# Allegro board 野火_EBF6ULL F1 核心板_PCB封装参考设计_Allegro格式.brd
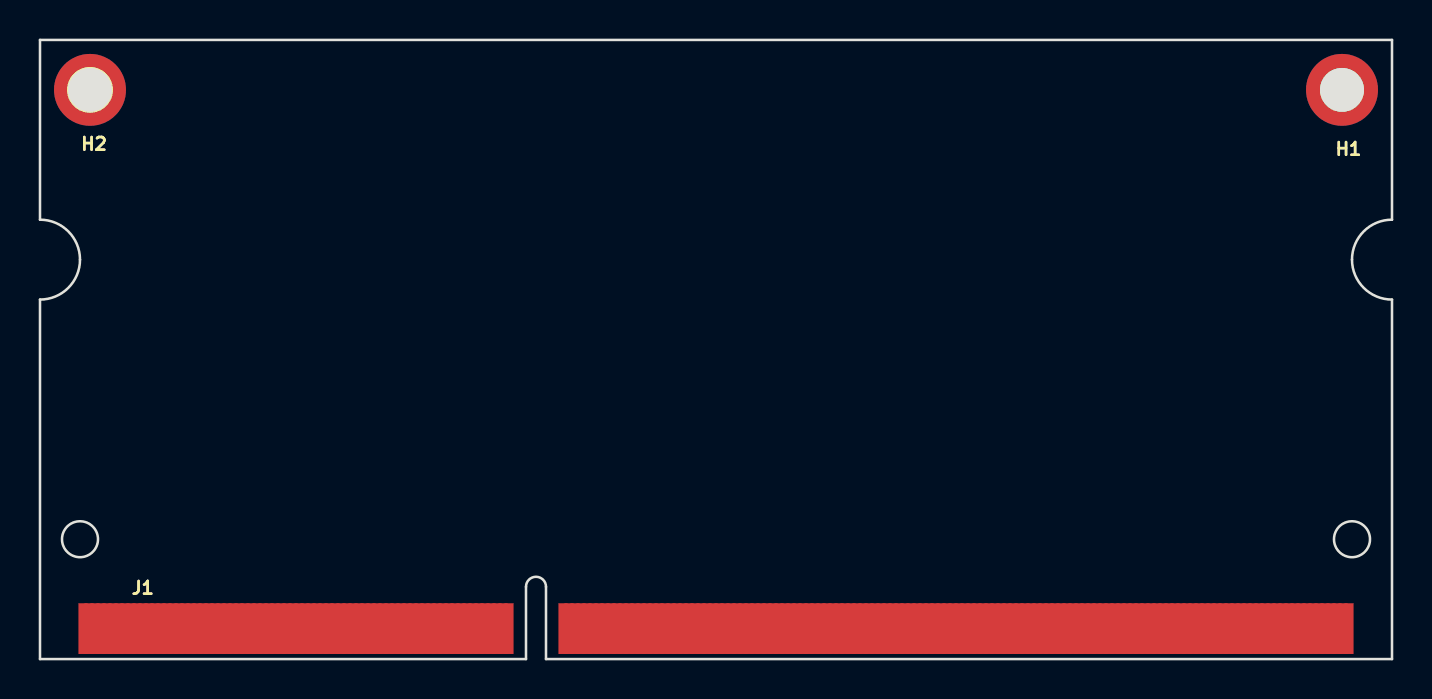
[diagram p0: board, top side]
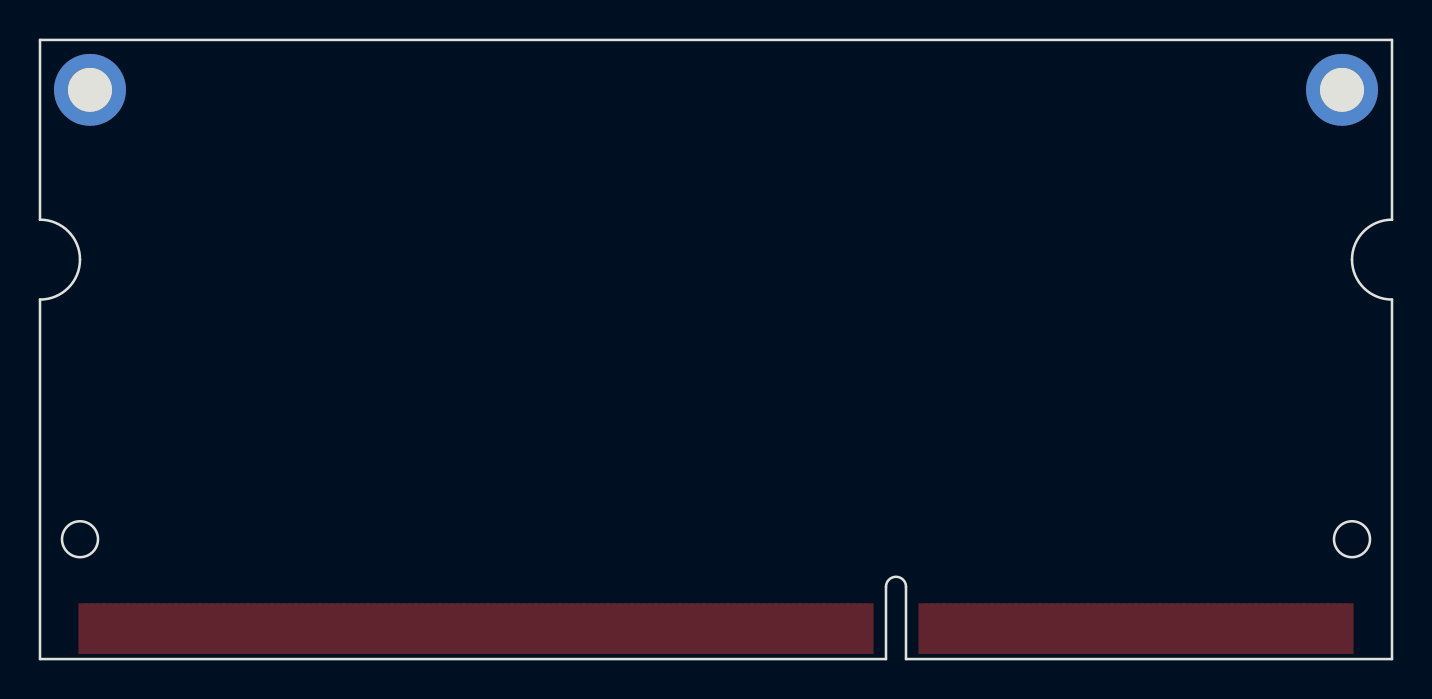
[diagram p1: board, bottom side, seen from below]

Outline 67.6 x 31 mm; copper layers: TOP, GND02, ART03, ART04, POWER05, BOTTOM. Coordinates in mm from the lower left corner of the outline.
Outline path: 67.6,31 0,31

## Design rules (mm)
constraint set DEFAULT: min track width 0.127
net group USB_OTG1_D: nets USB_OTG1_DN USB_OTG1_DP
net group USB_OTG2_D: nets USB_OTG2_DN USB_OTG2_DP

## Placement (name value [footprint] x y rotation side)
H1  2.0mm  [T2_5-4]  65.1 28.5 270 top
H2  2.0mm  [T2_5-4]  2.5 28.5 270 top
J1  ddr3-sodimm204  [DDR3-SODIMM204-GOLD_FINGER]  33.8 0 0 top
NOREF  -  []  67.6 0 90 top
NOREF#2  -  []  0 0 0 top
NOREF#3  -  []  67.6 0 90 top
NOREF#4  -  []  1.62 29.16 0 top
NOREF#5  -  []  0 0 90 top

## Library data of the parts
H1 H2 = SPACER_0
J1 = ddr3-sodimm204

## Footprints (pads in the part's own frame, mm; a bottom-side part is the same pattern mirrored in y, then rotated)
DDR3-SODIMM204-GOLD_FINGER
  rect 0.457x2.54 smd: 1(-31.65,1.524) 2(-31.35,1.524) 3(-31.05,1.524) 4(-30.75,1.524) 5(-30.45,1.524) 6(-30.15,1.524) 7(-29.85,1.524) 8(-29.55,1.524) 9(-29.25,1.524) 10(-28.95,1.524) 11(-28.65,1.524) 12(-28.35,1.524) 13(-28.05,1.524) 14(-27.75,1.524) 15(-27.45,1.524) 16(-27.15,1.524) 17(-26.85,1.524) 18(-26.55,1.524) 19(-26.25,1.524) 20(-25.95,1.524) 21(-25.65,1.524) 22(-25.35,1.524) 23(-25.05,1.524) 24(-24.75,1.524) 25(-24.45,1.524) 26(-24.15,1.524) 27(-23.85,1.524) 28(-23.55,1.524) 29(-23.25,1.524) 30(-22.95,1.524) 31(-22.65,1.524) 32(-22.35,1.524) 33(-22.05,1.524) 34(-21.75,1.524) 35(-21.45,1.524) 36(-21.15,1.524) 37(-20.85,1.524) 38(-20.55,1.524) 39(-20.25,1.524) 40(-19.95,1.524) 41(-19.65,1.524) 42(-19.35,1.524) 43(-19.05,1.524) 44(-18.75,1.524) 45(-18.45,1.524) 46(-18.15,1.524) 47(-17.85,1.524) 48(-17.55,1.524) 49(-17.25,1.524) 50(-16.95,1.524) 51(-16.65,1.524) 52(-16.35,1.524) 53(-16.05,1.524) 54(-15.75,1.524) 55(-15.45,1.524) 56(-15.15,1.524) 57(-14.85,1.524) 58(-14.55,1.524) 59(-14.25,1.524) 60(-13.95,1.524) 61(-13.65,1.524) 62(-13.35,1.524) 63(-13.05,1.524) 64(-12.75,1.524) 65(-12.45,1.524) 66(-12.15,1.524) 67(-11.85,1.524) 68(-11.55,1.524) 69(-11.25,1.524) 70(-10.95,1.524) 71(-10.65,1.524) 72(-10.35,1.524) 73(-7.65,1.524) 74(-7.35,1.524) 75(-7.05,1.524) 76(-6.75,1.524) 77(-6.45,1.524) 78(-6.15,1.524) 79(-5.85,1.524) 80(-5.55,1.524) 81(-5.25,1.524) 82(-4.95,1.524) 83(-4.65,1.524) 84(-4.35,1.524) 85(-4.05,1.524) 86(-3.75,1.524) 87(-3.45,1.524) 88(-3.15,1.524) 89(-2.85,1.524) 90(-2.55,1.524) 91(-2.25,1.524) 92(-1.95,1.524) 93(-1.65,1.524) 94(-1.35,1.524) 95(-1.05,1.524) 96(-0.75,1.524) 97(-0.45,1.524) 98(-0.15,1.524) 99(0.15,1.524) 100(0.45,1.524) 101(0.75,1.524) 102(1.05,1.524) 103(1.35,1.524) 104(1.65,1.524) 105(1.95,1.524) 106(2.25,1.524) 107(2.55,1.524) 108(2.85,1.524) 109(3.15,1.524) 110(3.45,1.524) 111(3.75,1.524) 112(4.05,1.524) 113(4.35,1.524) 114(4.65,1.524) 115(4.95,1.524) 116(5.25,1.524) 117(5.55,1.524) 118(5.85,1.524) 119(6.15,1.524) 120(6.45,1.524) 121(6.75,1.524) 122(7.05,1.524) 123(7.35,1.524) 124(7.65,1.524) 125(7.95,1.524) 126(8.25,1.524) 127(8.55,1.524) 128(8.85,1.524) 129(9.15,1.524) 130(9.45,1.524) 131(9.75,1.524) 132(10.05,1.524) 133(10.35,1.524) 134(10.65,1.524) 135(10.95,1.524) 136(11.25,1.524) 137(11.55,1.524) 138(11.85,1.524) 139(12.15,1.524) 140(12.45,1.524) 141(12.75,1.524) 142(13.05,1.524) 143(13.35,1.524) 144(13.65,1.524) 145(13.95,1.524) 146(14.25,1.524) 147(14.55,1.524) 148(14.85,1.524) 149(15.15,1.524) 150(15.45,1.524) 151(15.75,1.524) 152(16.05,1.524) 153(16.35,1.524) 154(16.65,1.524) 155(16.95,1.524) 156(17.25,1.524) 157(17.55,1.524) 158(17.85,1.524) 159(18.15,1.524) 160(18.45,1.524) 161(18.75,1.524) 162(19.05,1.524) 163(19.35,1.524) 164(19.65,1.524) 165(19.95,1.524) 166(20.25,1.524) 167(20.55,1.524) 168(20.85,1.524) 169(21.15,1.524) 170(21.45,1.524) 171(21.75,1.524) 172(22.05,1.524) 173(22.35,1.524) 174(22.65,1.524) 175(22.95,1.524) 176(23.25,1.524) 177(23.55,1.524) 178(23.85,1.524) 179(24.15,1.524) 180(24.45,1.524) 181(24.75,1.524) 182(25.05,1.524) 183(25.35,1.524) 184(25.65,1.524) 185(25.95,1.524) 186(26.25,1.524) 187(26.55,1.524) 188(26.85,1.524) 189(27.15,1.524) 190(27.45,1.524) 191(27.75,1.524) 192(28.05,1.524) 193(28.35,1.524) 194(28.65,1.524) 195(28.95,1.524) 196(29.25,1.524) 197(29.55,1.524) 198(29.85,1.524) 199(30.15,1.524) 200(30.45,1.524) 201(30.75,1.524) 202(31.05,1.524) 203(31.35,1.524) 204(31.65,1.524)
T2_5-4
  round 3.6 hole 2.2: 1(0,0)

## Nets
GND: H1.1(NC_1) H2.1(NC_1) J1.11(P11) J1.13(P13) J1.14(P14) J1.15(P15) J1.16(P16) J1.17(P17) J1.26(P26) J1.27(P27) J1.29(P29) J1.35(P35) J1.38(P38) J1.41(P41) J1.47(P47) J1.50(P50) J1.56(P56) J1.59(P59) J1.66(P66) J1.70(P70) J1.71(P71) J1.72(P72) J1.73(P73) J1.74(P74) J1.76(P76) J1.78(P78) J1.80(P80) J1.82(P82) J1.83(P83) J1.84(P84) J1.86(P86) J1.87(P87) J1.88(P88) J1.90(P90) J1.91(P91) J1.92(P92) J1.93(P93) J1.95(P95) J1.99(P99) J1.103(P103) J1.107(P107) J1.110(P110) J1.111(P111) J1.112(P112) J1.115(P115) J1.116(P116) J1.123(P123) J1.124(P124) J1.133(P133) J1.134(P134) J1.139(P139) J1.140(P140) J1.145(P145) J1.146(P146) J1.151(P151) J1.152(P152) J1.154(P154) J1.156(P156) J1.157(P157) J1.158(P158) J1.160(P160) J1.162(P162) J1.163(P163) J1.164(P164) J1.173(P173) J1.174(P174) J1.183(P183) J1.184(P184) J1.193(P193) J1.194(P194) J1.197(P197) J1.198(P198) J1.202(P202) J1.203(P203) J1.204(P204)
VCC_SYS: J1.1(P1) J1.2(P2) J1.3(P3) J1.4(P4) J1.5(P5) J1.6(P6) J1.7(P7) J1.8(P8)
VDD_COIN_3V: J1.12(P12)
BOOT_MODE0: J1.21(P21)
BOOT_MODE1: J1.19(P19)
CLK1_N: J1.52(P52)
CLK1_P: J1.54(P54)
CSI_DATA0: J1.108(P108)
CSI_DATA1: J1.106(P106)
CSI_DATA2: J1.104(P104)
CSI_DATA3: J1.102(P102)
CSI_DATA4: J1.100(P100)
CSI_DATA5: J1.98(P98)
CSI_DATA6: J1.96(P96)
CSI_DATA7: J1.94(P94)
CSI_HSYNC: J1.109(P109)
CSI_MCLK: J1.97(P97)
CSI_PIXCLK: J1.101(P101)
CSI_VSYNC: J1.105(P105)
ENET1_CRS_DV: J1.126(P126)
ENET1_RXD0: J1.120(P120)
ENET1_RXD1: J1.122(P122)
ENET1_RXER: J1.118(P118)
ENET1_TX_CLK: J1.114(P114)
ENET1_TXD0: J1.128(P128)
ENET1_TXD1: J1.130(P130)
ENET1_TXEN: J1.132(P132)
ENET2_CRS_DV: J1.125(P125)
ENET2_RXD0: J1.119(P119)
ENET2_RXD1: J1.121(P121)
ENET2_RXER: J1.117(P117)
ENET2_TX_CLK: J1.113(P113)
ENET2_TXD0: J1.127(P127)
ENET2_TXD1: J1.129(P129)
ENET2_TXEN: J1.131(P131)
GPIO_0: J1.69(P69)
GPIO_1: J1.67(P67)
GPIO_2: J1.65(P65)
GPIO_3: J1.63(P63)
GPIO_4: J1.61(P61)
GPIO_5: J1.57(P57)
GPIO_6: J1.55(P55)
GPIO_7: J1.53(P53)
GPIO_8: J1.51(P51)
GPIO_9: J1.49(P49)
LCD_DATA0: J1.191(P191)
LCD_DATA1: J1.192(P192)
LCD_DATA2: J1.189(P189)
LCD_DATA3: J1.190(P190)
LCD_DATA4: J1.187(P187)
LCD_DATA5: J1.188(P188)
LCD_DATA6: J1.185(P185)
LCD_DATA7: J1.186(P186)
LCD_DATA8: J1.181(P181)
LCD_DATA9: J1.182(P182)
LCD_DATA10: J1.179(P179)
LCD_DATA11: J1.180(P180)
LCD_DATA12: J1.177(P177)
LCD_DATA13: J1.178(P178)
LCD_DATA14: J1.175(P175)
LCD_DATA15: J1.176(P176)
LCD_DATA16: J1.171(P171)
LCD_DATA17: J1.172(P172)
LCD_DATA18: J1.169(P169)
LCD_DATA19: J1.170(P170)
LCD_DATA20: J1.167(P167)
LCD_DATA21: J1.168(P168)
LCD_DATA22: J1.165(P165)
LCD_DATA23: J1.166(P166)
LCD_DE: J1.199(P199)
LCD_HSYNC: J1.196(P196)
LCD_PCLK: J1.195(P195)
LCD_RST: J1.201(P201)
LCD_VSYNC: J1.200(P200)
NUSB_OTG_CHD: J1.43(P43)
ONOFF: J1.22(P22)
PMIC_ON_REQ: J1.20(P20)
PMIC_STBY_REQ: J1.18(P18)
POR_B: J1.24(P24)
SAI2_BCLK: J1.62(P62)
SAI2_MCLK: J1.58(P58)
SAI2_RXD: J1.68(P68)
SAI2_SYNC: J1.64(P64)
SAI2_TXD: J1.60(P60)
SD1_CLK: J1.89(P89)
SD1_CMD: J1.85(P85)
SD1_DATA0: J1.75(P75)
SD1_DATA1: J1.77(P77)
SD1_DATA2: J1.79(P79)
SD1_DATA3: J1.81(P81)
SNVS_TAMPER0: J1.48(P48)
SNVS_TAMPER1: J1.46(P46)
SNVS_TAMPER2: J1.44(P44)
SNVS_TAMPER3: J1.42(P42)
SNVS_TAMPER4: J1.40(P40)
SNVS_TAMPER5: J1.36(P36)
SNVS_TAMPER6: J1.34(P34)
SNVS_TAMPER7: J1.32(P32)
SNVS_TAMPER8: J1.30(P30)
SNVS_TAMPER9: J1.28(P28)
SPDIF_TX: J1.45(P45)
UART1_CTS: J1.136(P136)
UART1_RTS: J1.138(P138)
UART1_RXD: J1.137(P137)
UART1_TXD: J1.135(P135)
UART2_CTS: J1.142(P142)
UART2_RTS: J1.144(P144)
UART2_RXD: J1.143(P143)
UART2_TXD: J1.141(P141)
UART3_CTS: J1.148(P148)
UART3_RTS: J1.150(P150)
UART3_RXD: J1.149(P149)
UART3_TXD: J1.147(P147)
UART4_RXD: J1.155(P155)
UART4_TXD: J1.153(P153)
UART5_RXD: J1.161(P161)
UART5_TXD: J1.159(P159)
USB_OTG1_DN: J1.39(P39)
USB_OTG1_DP: J1.37(P37)
USB_OTG1_VBUS: J1.23(P23)
USB_OTG2_DN: J1.33(P33)
USB_OTG2_DP: J1.31(P31)
USB_OTG2_VBUS: J1.25(P25)

Pads without a net: J1 9 10
